# Altium PCB PCB1.PcbDoc
Units mm, origin at the board's own origin, x right, y up, seen from the top; angles counter-clockwise.
Board outline 104.8 x 101.6 mm, 2 copper layers (Top Layer, Bottom Layer); 25 components, 27 nets, 125 pads, 0 vias.
Unrouted connection lines stored in the file: 1.
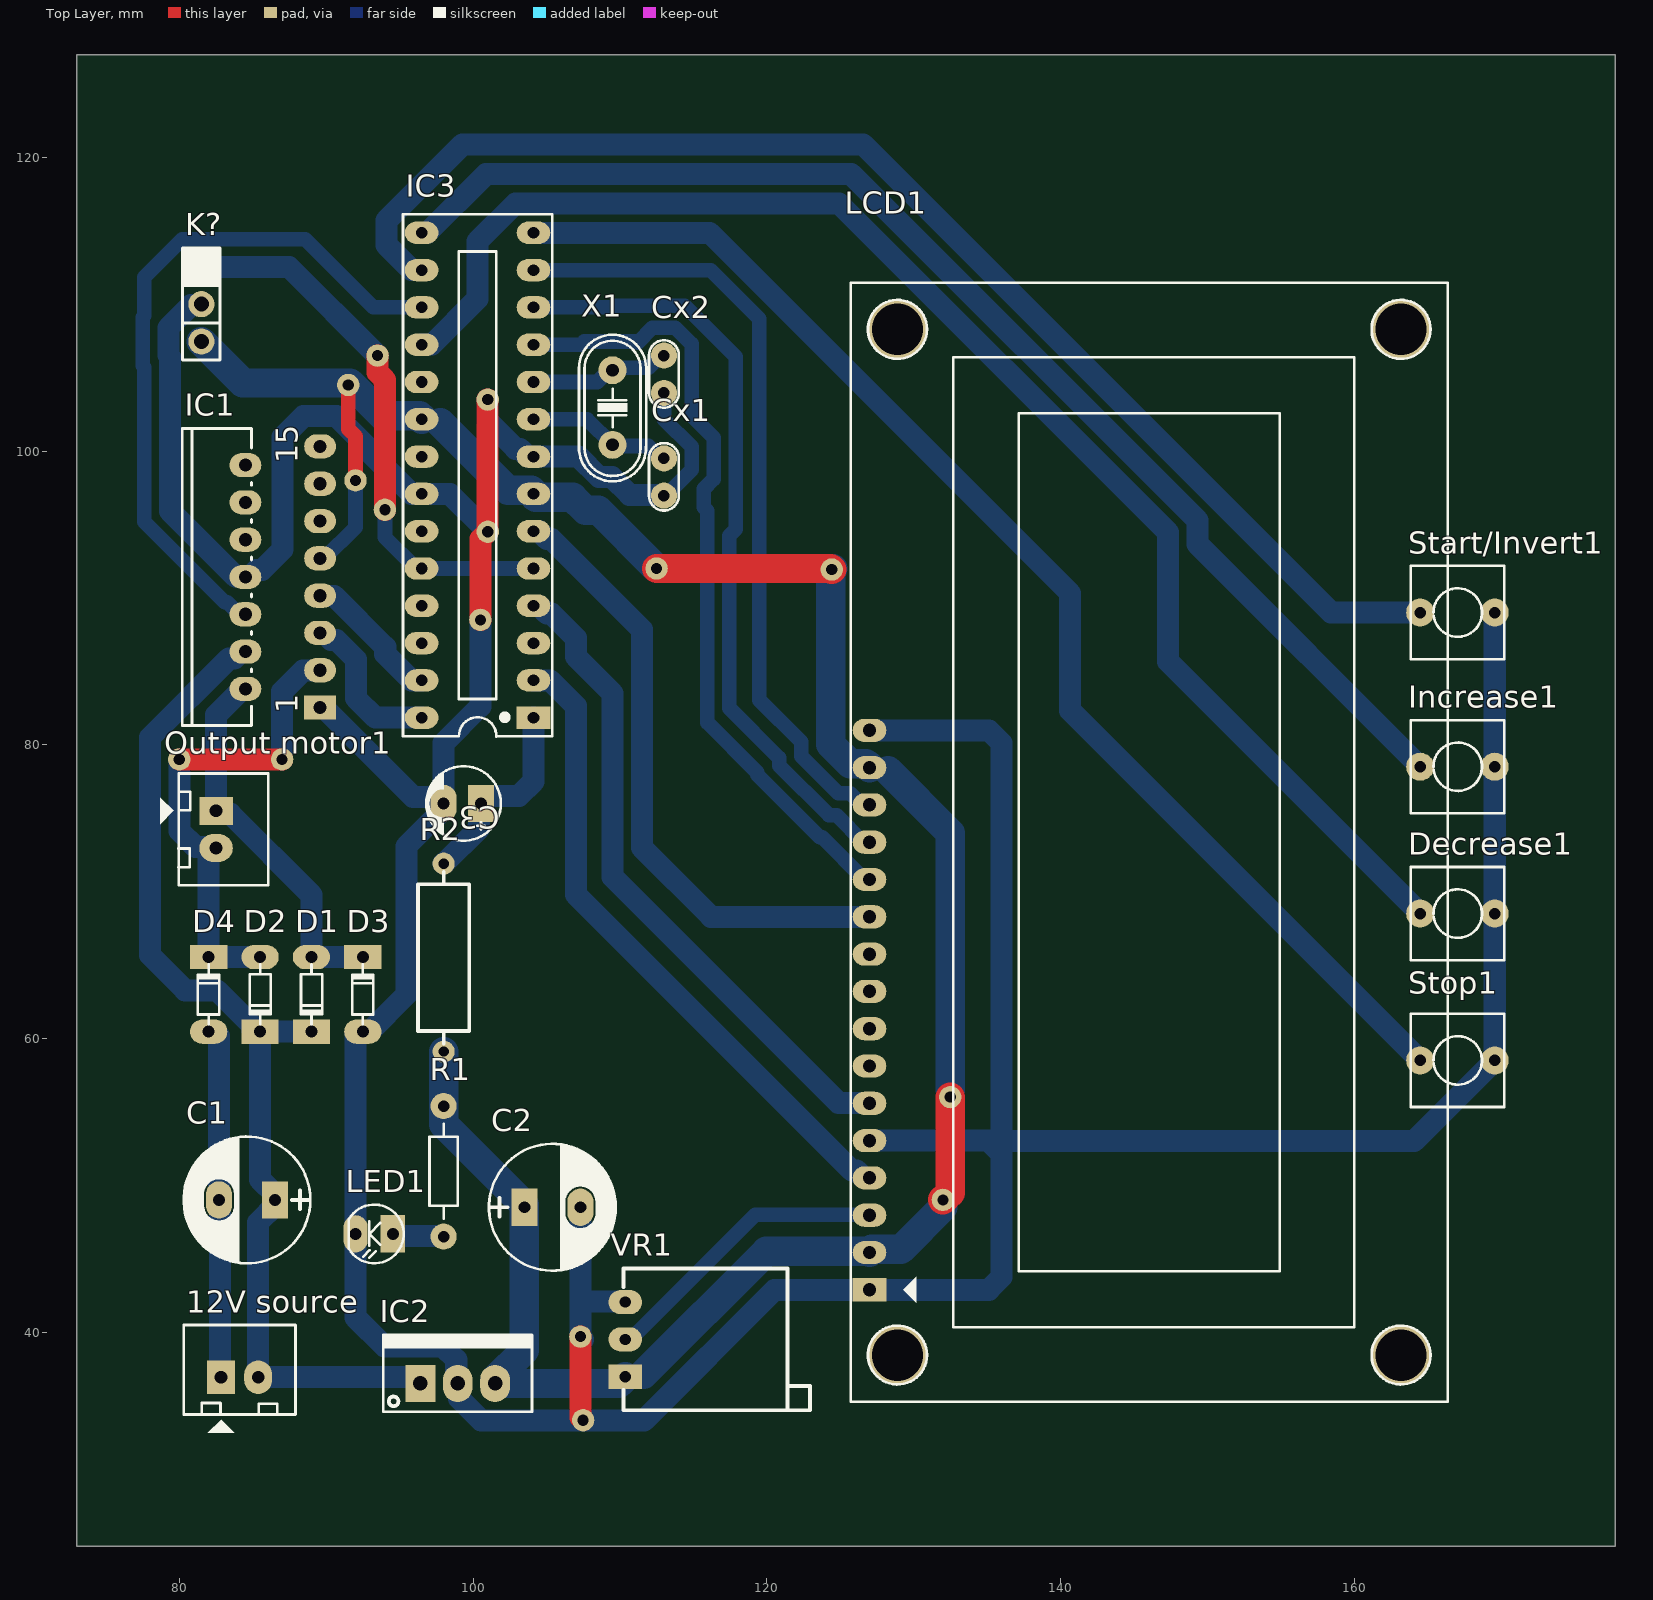
[diagram p0: Top Layer view]
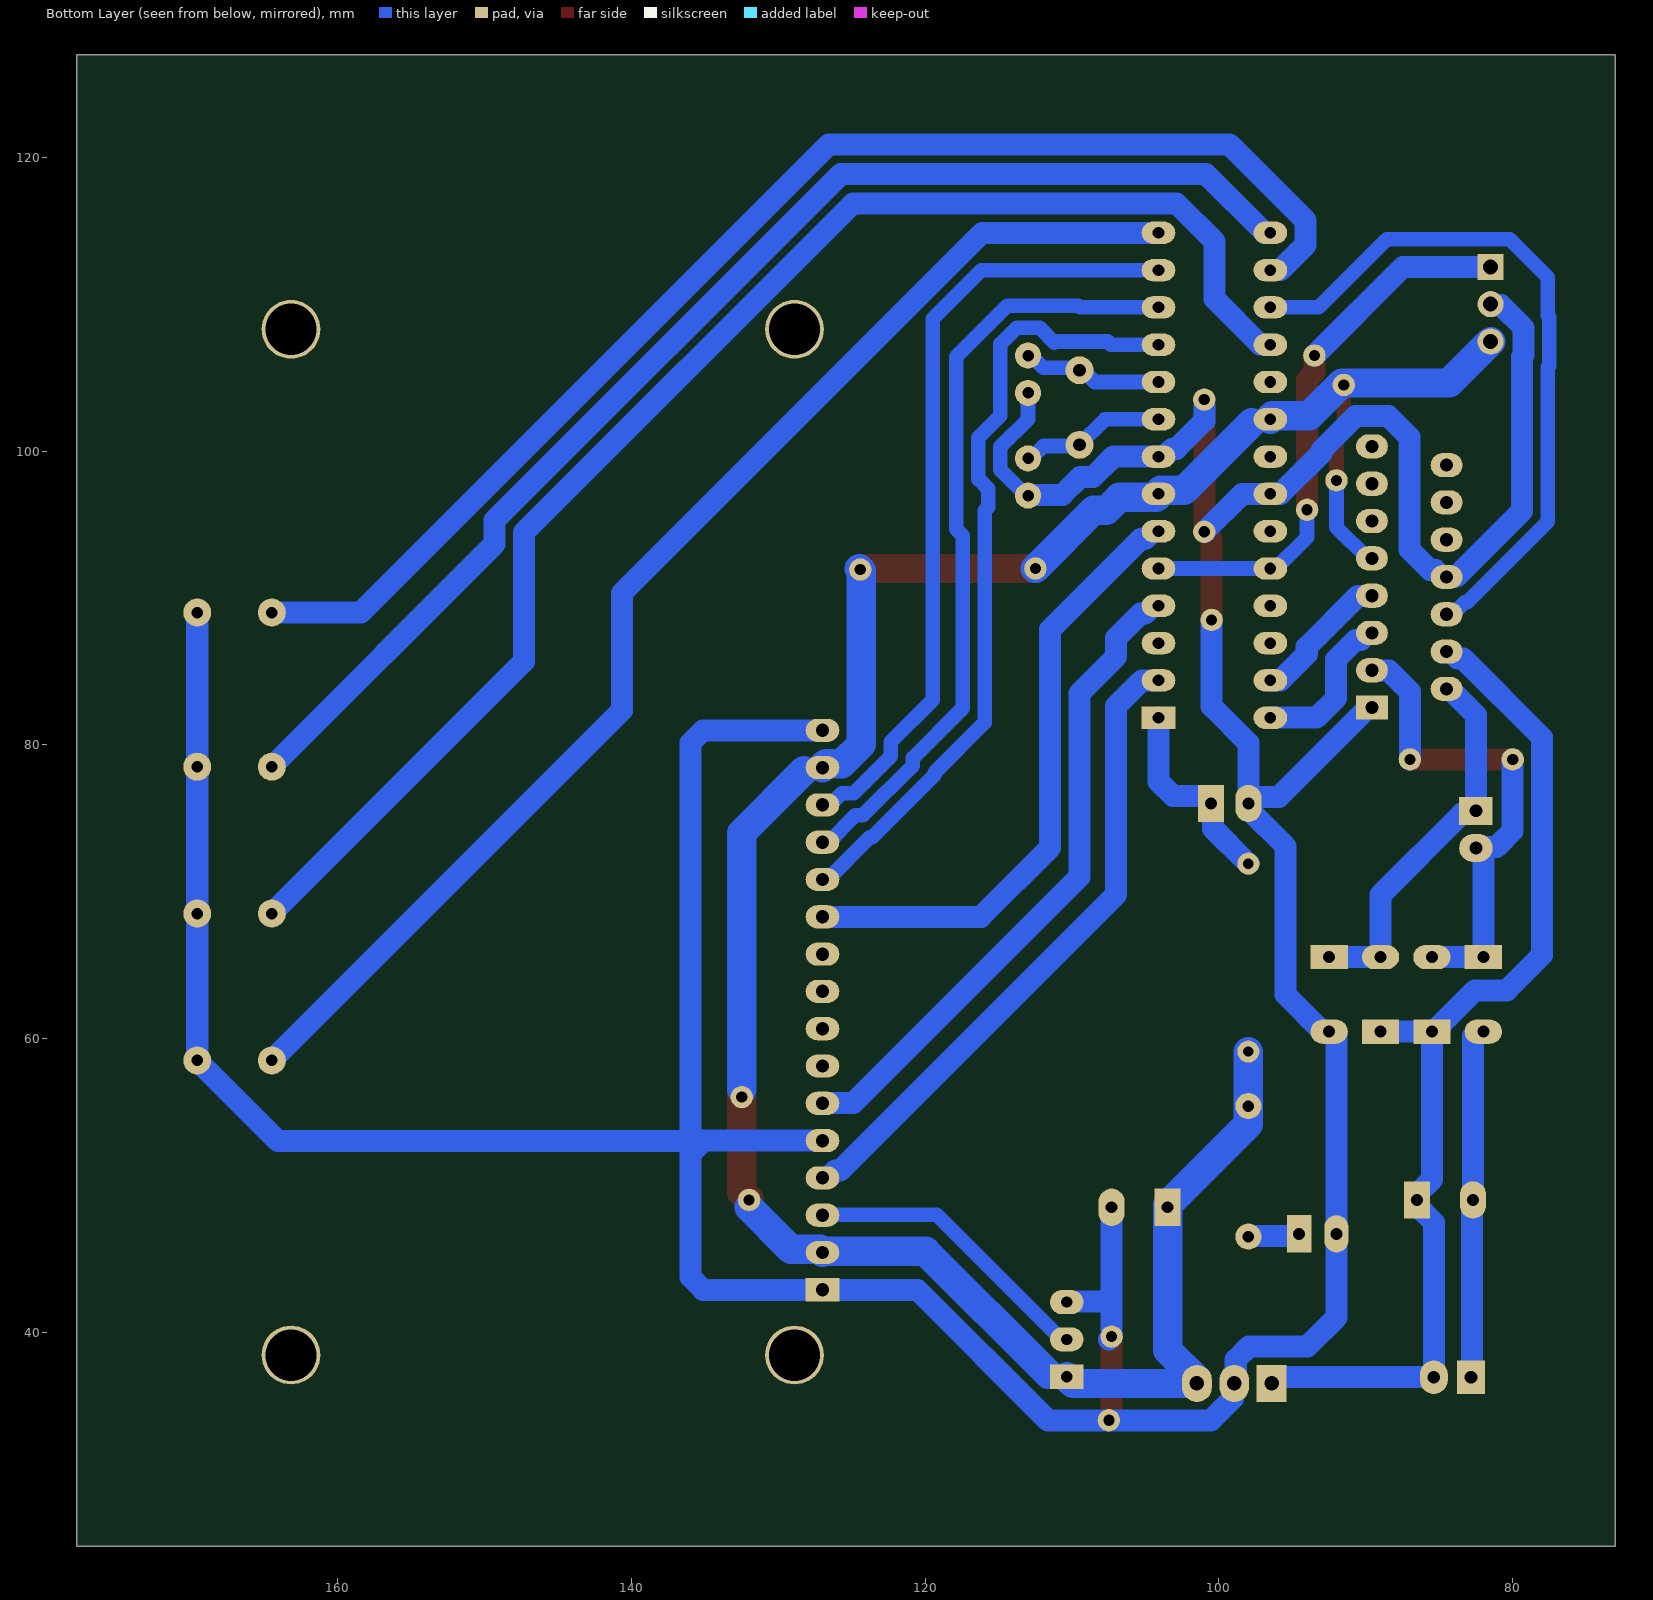
[diagram p1: Bottom Layer view, seen from below]
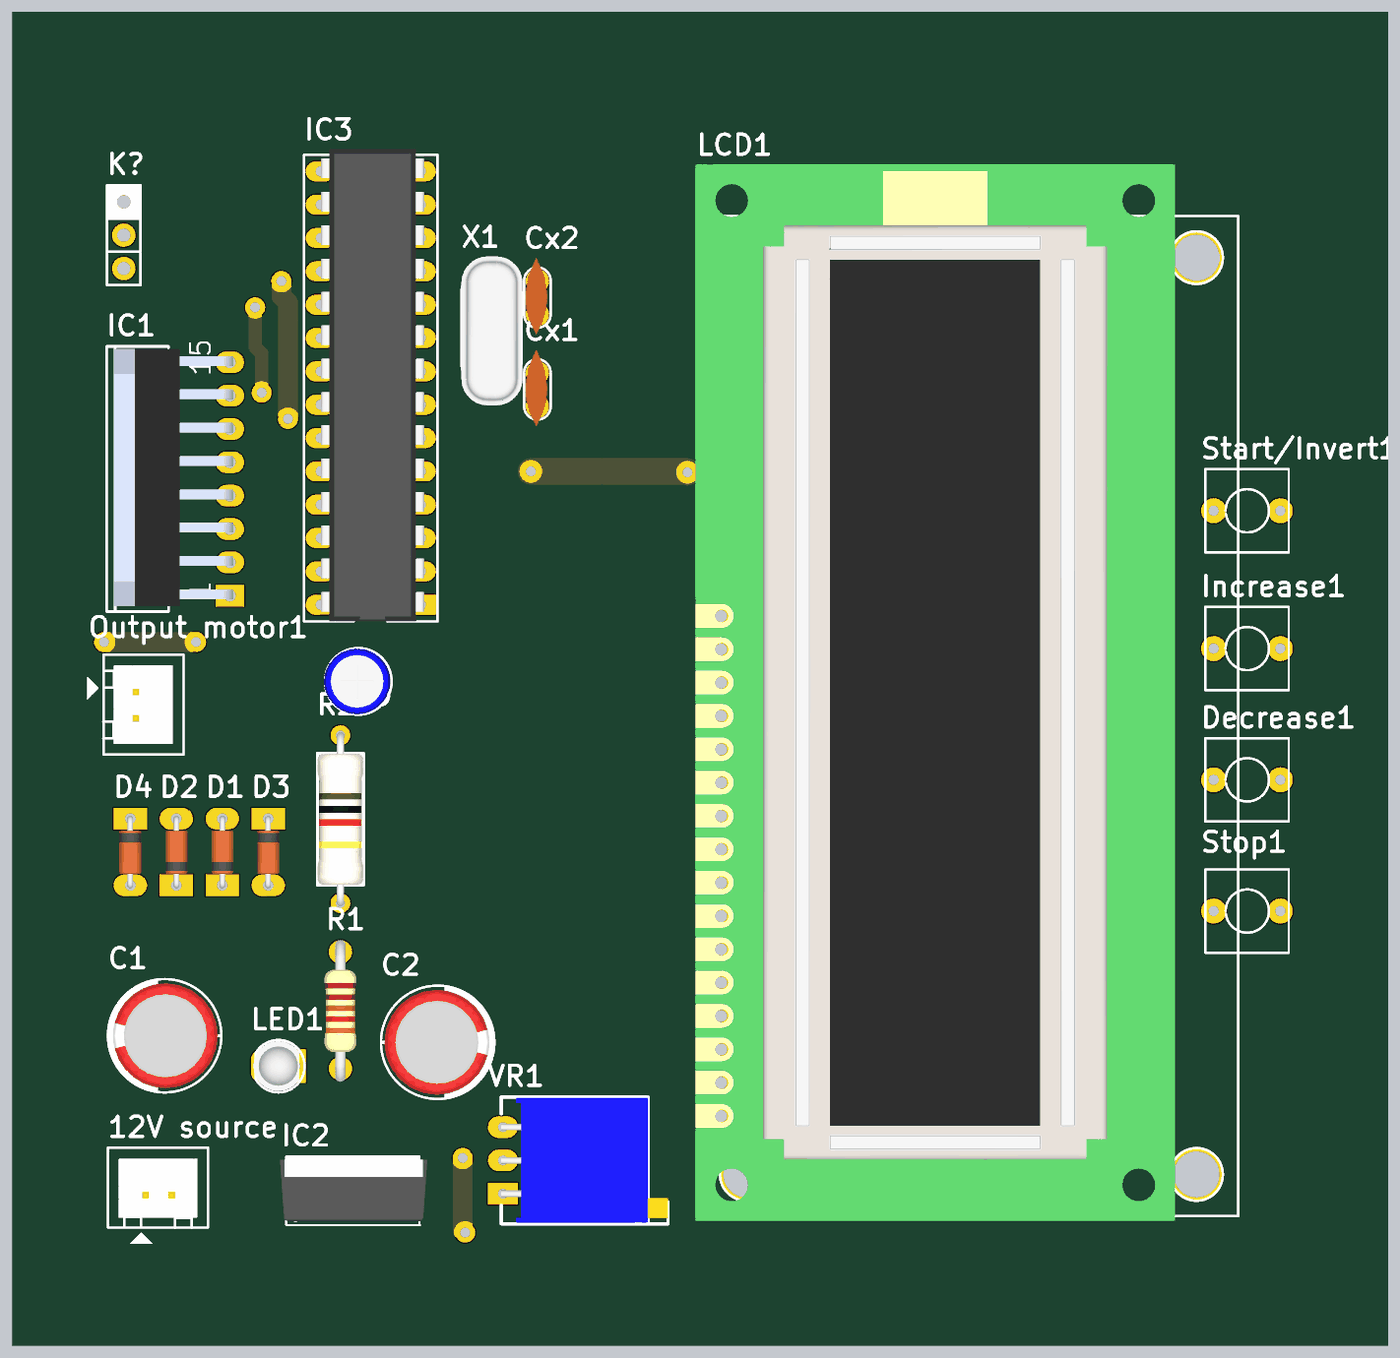
[diagram p2: 3D render of the assembled board from above, using the file's embedded part models]

## Layer stack, top to bottom
Top Solder: solder mask 0.0102, Solder Resist, Dk 3.5
Top Layer: signal copper 0.0356
Dielectric 1: dielectric 0.32, FR-4, Dk 4.8
Bottom Layer: signal copper 0.0356
Bottom Solder: solder mask 0.0102, Solder Resist, Dk 3.5

## Board outline
73,25.4 177.8,25.4 177.8,127 73,127

## Design rules (kind name [scope] priority, off if disabled: settings)
Clearance [All] p1: gap=0.5 ignorepadtopadclearanceinfootprint=FALSE
HoleSize [All] p1: absolutevalues=TRUE maxlimit=2.54 minlimit=1 maxpercent=80.000 minpercent=20.000
PlaneClearance [All] p1: clearance=2
PolygonConnect [All] p1: connectstyle=Direct reliefconductorwidth=0.254 reliefentries=4 polygonreliefangle="90 Angle" airgapwidth=0.254
RoutingVias [All] p1: holewidth=0.711 width=1.27 viastyle="Through Hole" minholewidth=0.711 minwidth=1.27 maxholewidth=0.711 maxwidth=1.27
SolderMaskExpansion [All] p1: expansion=0.102 istentingtop=FALSE
SupplyNets "Schematic Supply Nets" [InNet('GND')] p1: voltage=0.000
SupplyNets "Schematic Supply Nets_2" [InNet('+5')] p2: voltage=0.000
SupplyNets "Schematic Supply Nets_1" [InNet('+12')] p3: voltage=0.000
Width VCC [InNet('+5')] p1: maxlimit=2 minlimit=1 preferedwidth=1
Width [All] p2: maxlimit=1.5 minlimit=1 preferedwidth=1.5
28 further rules are at their usual default settings.

## Components (designator, comment, footprint, x,y, rotation, side; value= is the part's Value field where it differs from the comment)
"12V source" "JP2" CON2 82.832,36.926 r0 top value="Connector 2"
C1 "220uF/35V" CP1.5/3.4 86.515,49 r180 top value=100uF/35V/50V
C2 "220uF/35V" CP1.5/3.4 103.5,48.5 r0 top value=100uF/35V/50V
C3 "10uF" CP1/2 100.54,76 r180 top value=10uF/50V
Cx1 "22pF" CN1 113,96.96 r90 top value=33pF
Cx2 "22pF" CN1 113,103.96 r90 top value=33pF
D1 "100v" "DIODE 0.5A" 89,63 r90 top
D2 "100v" "DIODE 0.5A" 85.5,63 r90 top
D3 "100v" "DIODE 0.5A" 92.5,63 r270 top
D4 "100v" "DIODE 0.5A" 82,63 r270 top
Decrease1 "SW" SW2 169.58,68.5 r180 top value="SW chip 2 pin"
IC1 "L298" DIP15SL2 87.04,91.42 r90 top
IC2 "LM7805" QTO-220 96.42,36.5 r0 top
IC3 "ATmega8-L" DIP28/W0.3 104.12,81.84 r90 top
Increase1 "SW" SW2 169.58,78.5 r180 top value="SW chip 2 pin"
K? "HEADER-1X3" HEADER-1X3 81.5,112.54 r0 top
LCD1 "LCD16x2A" LCD16X2 127,42.88 r90 top
LED1 "LED" LED-3 94.54,46.691 r180 top value="LED 3 ly Single Colour"
"Output motor1" "JP2" CON2 82.5,75.5 r270 top value="Connector 2"
R1 "220R" R1/4W 98,46.5 r90 top value="R1/4W - 1K"
R2 "10k" "tro vach 1/2w" 98,65.5 r270 top
Start/Invert1 "SW" SW2 169.58,89 r180 top value="SW chip 2 pin"
Stop1 "SW" SW2 169.58,58.5 r180 top value="SW chip 2 pin"
VR1 "1" "BIEN TRO VI CHINH NAM" 110.5,39.5 r90 top
X1 "16Mhz" XT2 109.5,102.96 r90 top value=4Mhz

## Footprints (in the part's own frame and the unit in brackets; to place one, negate y for a bottom-side part, rotate by r counter-clockwise, add the part's x,y. Pads: shape width x height; smd on the part's side, far side on the other; paste and mask are expansions set on the pad)
"BIEN TRO VI CHINH NAM" [mil]
  rect 65x90 hole 30: 1(-100,5)
  oval 65x90 hole 30: 2(0,5) 3(100,5)
  silkscreen extent -190,-490 190,10, body extent -187,-490 188,10, height 226
CN1 [mil]
  round 70 hole 31: 1(0,0) 2(100,0)
  silkscreen extent -40,-40 141,40, body extent -60,-30 170,37, height 265
CON2 [mil] "CON2"
  rect 75x90 hole 34: 1(0,0)
  oval 75x90 hole 34: 2(100,0)
  silkscreen extent -100,-150 200,140, body extent -68,-70 168,107, height 236
CP1.5/3.4 [mil] "Tu hoa 220->470uF,16V, 470uF/16V,25V"
  rect 70x100 hole 32: 1(0,0)
  oval 70x100 hole 32: 2(150,0)
  silkscreen extent -95,-170 245,170, body extent -85,-157 230,157, height 446
CP1/2 [mil] "Tu hoa < 22uF/16>50V"
  rect 70x100 hole 32: 1(0,0)
  oval 70x100 hole 32: 2(100,0)
  silkscreen extent -53,-100 147,100, body extent -49,-99 149,99, height 287
"DIODE 0.5A" [mil] "Diode muoi, xung"
  oval 65x100 hole 32: 1(100,0)
  rect 65x100 hole 32: 2(-100,0)
  silkscreen extent -80,-30 80,28, body extent -108,-33 108,32, height 61
DIP15SL2 [mil] "TO, Thru-Hole, Vertical, Heatsink Mounted; 15 Bent Staggered Leads; Pitch 1.27 mm"
  rect 65x85 hole 35.43: 1(-350,-100)
  oval 65x85 hole 35.43: 2(-300,100) 3(-250,-100) 4(-200,100) 5(-150,-100) 6(-100,100) 7(-50,-100) 8(0,100) 9(50,-100) 10(100,100) 11(150,-100) 12(200,100) 13(250,-100) 14(300,100) 15(350,-100)
  silkscreen extent -398,84 398,269, body extent -382,-110 390,247, height 895
DIP28/W0.3 [mil] "28 PIN, W 300mil, Pin to pin 100mil"
  rect 60x90 hole 31: 1(0,0)
  oval 60x90 hole 31: 2(100,0) 3(200,0) 4(300,0) 5(400,0) 6(500,0) 7(600,0) 8(700,0) 9(800,0) 10(900,0) 11(1000,0) 12(1100,0) 13(1200,0) 14(1300,0) 15(1300,300) 16(1200,300) 17(1100,300) 18(1000,300) 19(900,300) 20(800,300) 21(700,300) 22(600,300) 23(500,300) 24(400,300) 25(300,300) 26(200,300) 27(100,300) 28(0,300)
  silkscreen extent -50,-50 1350,350, body extent -50,-10 1367,300, height 200
HEADER-1X3 [mil]
  rect 70x70 hole 40: 1(0,0)
  round 70 hole 40: 2(0,-100) 3(0,-200)
  silkscreen extent -50,-250 50,50, body extent -50,-250 50,50, height 470
LCD16X2 [mil] "LCD dipslay 16x2, 16 pin"
  rect 62x90 hole 36: 1(0,0)
  oval 62x90 hole 36: 2(100,0) 3(200,0) 4(300,0) 5(400,0) 6(500,0) 7(600,0) 8(700,0) 9(800,0) 10(900,0) 11(1000,0) 12(1100,0) 13(1200,0) 14(1300,0) 15(1400,0) 16(1500,0)
  round 157.48 hole 137.8: "Hole 0"(-175,-75) "Hole 0"(-175,-1425) "Hole 0"(2575,-1425) "Hole 0"(2575,-75)
  silkscreen extent -300,-1550 2700,50, body extent -315,-1360 2855,77, height 414
LED-3 [mil] "LED 2 PIN, 3ly Only colour"
  rect 65x100 hole 32: 1(0,0)
  oval 65x100 hole 32: 2(100,0)
  silkscreen extent -29,-78 118,79, body extent -13,-75 125,75, height 217
QTO-220 [mil] "TO-220 - 1-2-3"
  rect 80x100 hole 39: 1(0,0)
  oval 80x100 hole 39: 2(100,0) 3(200,0)
  silkscreen extent -100,-76 300,130, body extent -119,-64 322,121, height 755
R1/4W [mil] "R 1/4W, 2 Pin, 350mil"
  round 70 hole 31: 1(0,0) 2(350,0)
  silkscreen extent 48,-38 302,38, body extent -40,-47 386,47, height 111
SW2 [mil] "SW button 2pin, 250x 250 mil"
  round 75 hole 31: 1(0,0) 2(200,0)
  silkscreen extent -25,-125 225,125
"tro vach 1/2w" [mm]
  round 1.5 hole 0.7: 1(-6.4,0) 2(6.4,0)
  silkscreen extent -5.84,-1.75 5.84,1.75, body extent -6.62,-1.75 6.62,1.75, height 3.5
XT2 [mil] "Footpin for Crystal 2 pin"
  round 75 hole 34: 1(-100,0) 2(100,0)
  silkscreen extent -198,-90 195,90, body extent -233,-93 213,90, height 138

## Part data
"12V source" "Output motor1": library part Con2, "Connector 2"
C1 C2: library part CP3, "Cap 100uF/35V - 470uF/16V", Description 1="1000uF/6,3V - 470uF/16V - 330uF - 25V", Description 2="220uF/35V - 100uF/50V - 63V - 4,7uF/200V", Description 3="22uF => 33uF100V - 3,3uF => 4,7uF/250V", Description 4="2,2uF =>3,3uF/350 - 2,2uF/400V - 1uF/450V"
C3: library part CP1, "Cap P  0,1uF < 22uF , 16 - 50V", Description 1="10 => 220uF/6,3V/10V - 10uF => 100uF/16V", Description 2="0,1uF => 33uF/50V - 10uF => 22uF/63V", Description 3="0,47uF => 10uF/100V"
Cx1 Cx2: library part CN0, "Cremic For Xtal 1pF => 100pF"
D1 D2 D3 D4: library part "Diode 1N4148", "Cắm", Chung_Loai=Cắm, Don_Vi=Con, Ma_Hang=MH001065, Ten_Linh_Kien="Diode 1N4148 DO35 450mA 100V ( 1N4148 DIP)"
Decrease1 Increase1 Start/Invert1 Stop1: library part SW2, "Switch button 2 pin"
IC1: "Dual Full-H Driver", ComponentLink1Description="Manufacturer Link", ComponentLink1URL=http://www.ti.com/, DatasheetVersion=Jun-1990, Note="The tab is elec is connected to GND pin", PackageDescription="TO, Thru-Hole, Vertical, Heatsink Mounted; 15 Bent Staggered Leads; Pitch 1.27 mm", PackageReference=KV015, Published=15-May-2002, Publisher="Altium Limited"
IC2: library part LM78xx, "On ap +, from + 5 to + 24VDC"
IC3: "8-Bit AVR Microcontroller with 8K Bytes of In-System Programmable Flash Memory"
K?: Supplier Part Number 1=S1011E-36-ND, Supplier 1=Digi-Key
LCD1: library part LCD16x2, "LCD dipslay 16 char, 2 line"
LED1: "LED Single colour Green and Red"
R1: library part R, "Resistor 1/4W"
R2: library part "Tro Vach 1/2W 5% 10k", "Cắm", Chung_Loai=Cắm, Don_Vi=Con, Ma_Hang=MH006206, So_Chan=2, Ten_Linh_Kien="Trở 5% 1/2w 10k"
VR1: library part "Bien Tro Tinh Chinh 1K Nam", "Cắm", Chung_Loai=Cắm, Don_Vi=Con, Ma_Hang=MH003234, Ten_Linh_Kien="Biến Trở VR 102-1K 3296W"
X1: library part XT2, "Crystal For all Crystal 2pin."

## Free pads (board coordinates)
  round 1.524 hole 0.762: 21(87,79) 22(80,79) 23(107.31,39.69) 25(107.5,34) 26(132.5,56) 27(132,49) 28(112.5,92) 29(124.429,91.929) 30(93.5,106.5) 31(94,96) 32(92,98) 33(91.5,104.5) 34(101,103.5) 35(101,94.5) 36(100.5,88.5)

## Nets (pads, with @x,y where several pads share a name; then routed paths per layer and width w, separated by ;. In a path a pad name is that pad's centre, name@x,y a point inside that pad or via, vN(x,y) a via of type N, cw(c..) or ccw(c..) an arc to the next point about the centre after c; other vN are vias at no path point)
+5: C2.1 IC1.9 IC2.3 IC3.7 IC3.20 K?.3 LCD1.2 LCD1.15 pad.26 pad.27 pad.28 pad.29 pad.32 pad.33 R1.2 R2.2 VR1.1 | length 167.4
  Top Layer w1: pad.33 91.5,101.5 92,101 pad.32
  Top Layer w2: pad.28 124.357,92 pad.29 ; pad.27 132.5,49.5 pad.26
  Bottom Layer w1: IC1.9 89.876,92.69 92,94.814 pad.32
  Bottom Layer w2: K?.3 84.325,104.636 91.626,104.636 93.863,102.398 96.357,102.398 96.5,102.255 IC3.20 ; 97.778,101.922 102.382,97.318 103.977,97.318 104.12,97.175 IC3.7 104.12,96.985 104.263,96.842 106.781,96.842 107.656,95.967 108.533,95.967 pad.28 ; R2.2 R1.2 98,54.159 103.5,48.659 C2.1 103.5,38.763 101.5,36.763 IC2.3 109.944,36.5 110.373,36.929 VR1.1 ; 111.614,37.135 119.979,45.5 126.92,45.5 LCD1.2 127,45.49 127.143,45.633 129.133,45.633 pad.27@132,48.5 ; pad.29@124.5,92 pad.29 124.357,91.857 124.357,80.033 125.697,78.693 126.747,78.693 126.787,78.653 126.857,78.653 127,78.51 LCD1.15 ; 128.261,78.23 132.5,73.99 pad.26@132.5,56.5
+12: "12V source.2" C1.1 D1.2 D2.2 IC1.4 IC2.1 | length 72.8
  Bottom Layer w1.5: IC1.4 84.205,86.34 83.741,85.876 83.386,85.876 77.988,80.477 77.988,65.689 80.403,63.274 82.565,63.274 84.98,60.86 84.98,60.535 85.055,60.46 D2.2 ; D1.2 D2.2 ; IC2.1 96.42,36.66 96.154,36.926 85.372,36.926 85.372,47.476 86.515,48.619 C1.1 86.515,49.381 85.5,50.396 85.5,51.5 D2.2
B0: IC3.14 Stop1.2 | length 88.4
  Bottom Layer w1.5: IC3.14 116.115,114.86 140.664,90.311 140.664,82.336 Stop1.2
B1: IC3.15 Increase1.2 | length 87.3
  Bottom Layer w1.5: IC3.15 96.881,114.86 100.893,118.872 125.743,118.872 149.337,95.278 149.337,93.663 Increase1.2
B2: IC3.16 Start/Invert1.2 | length 90.5
  Bottom Layer w1.5: IC3.16 96.495,112.325 95.809,112.325 94.107,114.027 94.107,115.693 99.286,120.872 126.571,120.872 158.443,89 Start/Invert1.2
B3: IC1.6 IC3.17 | length 48.1
  Bottom Layer w1: IC1.6 84.07,88.88 83.251,89.699 83.097,89.699 77.611,95.185 77.611,105.692 77.5,105.803 77.5,109.117 77.611,109.228 77.611,111.843 80.197,114.429 88.571,114.429 93.22,109.78 IC3.17
B4: Decrease1.2 IC3.18 | length 99.5
  Bottom Layer w1.5: IC3.18 96.505,107.245 97.191,107.245 100.31,110.364 100.31,114.276 102.906,116.872 124.914,116.872 147.337,94.449 147.337,85.663 Decrease1.2
B5: IC3.19
C0: IC3.23
C3: IC3.26
C4: IC1.7 IC3.27 | length 9.6
  Bottom Layer w1.5: IC1.7 89.609,90.121 90.547,90.121 94.023,86.645 94.023,86.171 95.809,84.385 96.495,84.385 IC3.27
C5: IC1.5 IC3.28 | length 10.9
  Bottom Layer w1.5: IC1.5 89.875,87.61 90.339,87.146 90.694,87.146 92.023,85.816 92.023,83.169 93.352,81.84 IC3.28
D0: IC3.2 LCD1.4 | length 44.4
  Bottom Layer w1.5: IC3.2 104.125,84.375 105.257,84.375 107,82.633 107,69.803 125.8,51.003 126.122,51.003 126.624,50.5 LCD1.4
D2: IC3.4 LCD1.6 | length 45
  Bottom Layer w1.5: IC3.4 104.507,89.46 105.035,88.932 105.334,88.932 107,87.266 107,86 109.5,83.5 109.5,71 124.906,55.594 126.986,55.594 LCD1.6
D4: IC3.6 LCD1.11 | length 42.5
  Bottom Layer w1.5: IC3.6 104.507,94.54 105.035,94.012 105.334,94.012 111.5,87.846 111.5,73 116.22,68.28 LCD1.11
D5: IC3.11 LCD1.12 | length 54.1
  Bottom Layer w1: IC3.11 107.37,107.24 107.582,107.452 111.137,107.452 111.209,107.381 112.218,108.389 113.782,108.389 114.889,107.282 114.889,102.404 116.389,100.904 116.389,98.096 115.707,97.414 115.707,96.172 115.95,95.929 115.95,81.515 119.357,78.107 119.357,77.961 123.626,73.693 123.772,73.693 126.644,70.82 LCD1.12
D6: IC3.12 LCD1.13 | length 53
  Bottom Layer w1: IC3.12 109.469,109.78 109.578,109.889 114.404,109.889 117.889,106.404 117.889,94.672 117.45,94.232 117.45,82.5 120.857,79.093 120.857,78.583 124.247,75.193 124.757,75.193 126.59,73.36 LCD1.13
D7: IC3.13 LCD1.14 | length 53.7
  Bottom Layer w1: IC3.13 116.18,112.32 119.5,109 119.5,83.044 122.357,80.187 122.357,79.204 124.869,76.693 125.696,76.693 126.489,75.9 LCD1.14
encoder: IC3.5 IC3.24 K?.1 pad.30 pad.31 | length 38.1
  Top Layer w1.5: pad.30 93.505,106.495 93.505,105.341 94.012,104.833 94.012,96.018 94,96.006 pad.31
  Bottom Layer w1: pad.31 94,94.119 96.119,92 IC3.24 IC3.5
  Bottom Layer w1.5: K?.1 87.46,112.54 pad.30
GND: "12V source.1" C1.2 C2.2 C3.2 Cx1.1 Cx2.1 D3.1 D4.1 Decrease1.1 IC1.1 IC1.8 IC2.2 IC3.8 IC3.22 Increase1.1 K?.2 LCD1.1 LCD1.5 LCD1.16 LED1.2 pad.23 pad.25 pad.34 pad.35 pad.36 Start/Invert1.1 Stop1.1 VR1.3 | length 367.9
  Top Layer w1.5: pad.36 100.5,93.994 101,94.494 pad.35 pad.34 ; pad.23 107.31,34.197 107.5,34.006 pad.25
  Bottom Layer w1: Cx1.1 113.131,96.96 114.889,98.718 114.889,100.282 113,102.171 Cx2.1@113,103.885
  Bottom Layer w1.5: K?.2 81.447,109.947 80.805,109.947 79.25,108.392 79.25,106.528 79.361,106.417 79.361,95.91 83.822,91.449 84.471,91.449 IC1.8 84.795,91.42 85.259,91.885 85.614,91.885 87.04,93.311 87.04,100.959 88.466,102.386 90.694,102.386 92.99,100.09 92.99,99.904 95.809,97.085 96.495,97.085 IC3.22 96.505,97.075 98.425,97.075 pad.35 ; D4.1 82.404,60.46 82.705,60.159 C1.2 82.758,48.947 82.758,36.999 82.832,36.926 ; IC1.1 89.834,82.53 95.93,76.434 97.872,76.434 C3.2@98,76.306 ; pad.36 100.5,82.614 98,80.114 C3.2@98,76.306 ; pad.34@101,103 101,102.054 102.906,100.148 103.205,100.148 103.733,99.62 IC3.8 107.185,99.62 108.588,98.217 109.464,98.217 110.669,97.013 112.947,97.013 Cx1.1 ; C2.2 107.31,42.454 ; pad.23@107.5,39.5 pad.23 107.31,42.454 ; VR1.3 110.344,42.069 107.695,42.069 107.31,42.454 ; Cx2.1@113,103.885 Cx2.1 ; LCD1.5 135.081,53.04 136,52.121 136,43.759 135.121,42.88 LCD1.1 120.541,42.88 111.641,33.98 100.561,33.98 99.062,35.48 99.062,36.398 IC2.2 98.858,36.602 98.858,38.116 97.954,39.02 93.98,39.02 92,41 LED1.2 92,60.364 92.096,60.46 D3.1 92.944,60.46 95.46,62.976 95.46,73.079 98,75.619 C3.2 C3.2@98,76.306 ; LCD1.16 135.121,80.98 136,80.101 136,53 164.08,53 Stop1.1 Decrease1.1 Increase1.1 Start/Invert1.1
NetC3_1: C3.1 IC3.1 R2.1 | length 13.9
  Bottom Layer w1.5: R2.1 100.401,74.301 100.401,75.861 C3.1 100.54,76.361 100.679,76.5 103.121,76.5 104.12,77.499 IC3.1
NetCx1_2: Cx1.2 IC3.9 X1.1 | length 10
  Bottom Layer w1: IC3.9 107.76,102.16 X1.1 109.583,100.337 111.952,100.337 112.789,99.5 Cx1.2
NetCx2_2: Cx2.2 IC3.10 X1.2 | length 9.6
  Bottom Layer w1: IC3.10 108.455,104.7 109.255,105.5 X1.2 109.663,105.663 111.952,105.663 112.789,106.5 Cx2.2
NetLED1_1: LED1.1 R1.1 | length 3.6
  Bottom Layer w1.5: LED1.1 94.54,46.629 94.615,46.553 97.947,46.553 R1.1
OUT1: "Output motor1.1" D1.1 D3.2 IC1.2 | length 24.8
  Bottom Layer w1.5: 82.5,75.5 82.5,82.013 84.287,83.8 IC1.2 ; 83.468,75.297 89,69.765 D1.1 D3.2
OUT2: "Output motor1.2" D2.1 D4.2 IC1.3 pad.21 pad.22 | length 33.2
  Top Layer w1.5: pad.22 pad.21
  Bottom Layer w1.5: pad.22 80,74.137 81.099,73.037 82.423,73.037 82.5,72.96 ; 82,72.541 D4.2 D2.1 ; pad.21 87,83.623 88.418,85.041 89.551,85.041 IC1.3
VR: LCD1.3 VR1.2 | length 20.2
  Bottom Layer w1: VR1.2 110.732,39.5 119.232,48 126.96,48 LCD1.3
pads on no net: "LCD1.Hole 0" IC1.10 IC1.11 IC1.12 IC1.13 IC1.14 IC1.15 IC3.3 IC3.21 IC3.25 LCD1.7 LCD1.8 LCD1.9 LCD1.10

## Other copper
Multi-Layer:
  region: 253.038,218.244 268.446,218.244 268.446,210.559 253.038,210.559
  region: 253.038,218.244 268.446,218.244 268.446,210.559 253.038,210.559
  region: 253.038,218.244 268.446,218.244 268.446,210.559 253.038,210.559
  region: 232.613,216.993 237.808,216.993 237.808,211.81 232.613,211.81
  region: 232.613,216.993 237.808,216.993 237.808,211.81 232.613,211.81
  region: 232.613,216.993 237.808,216.993 237.808,211.81 232.613,211.81
  region: 232.613,216.993 237.808,216.993 237.808,211.81 232.613,211.81
  region: 232.613,216.993 237.808,216.993 237.808,211.81 232.613,211.81
  region: 232.613,216.993 237.808,216.993 237.808,211.81 232.613,211.81
  region: 232.613,216.993 237.808,216.993 237.808,211.81 232.613,211.81
  region: 232.613,216.993 237.808,216.993 237.808,211.81 232.613,211.81
  region: 232.613,216.993 237.808,216.993 237.808,211.81 232.613,211.81
  region: 232.613,216.993 237.808,216.993 237.808,211.81 232.613,211.81
  region: 232.613,216.993 237.808,216.993 237.808,211.81 232.613,211.81
  region: 232.613,216.993 237.808,216.993 237.808,211.81 232.613,211.81
  region: 232.613,216.993 237.808,216.993 237.808,211.81 232.613,211.81
  region: 232.613,216.993 237.808,216.993 237.808,211.81 232.613,211.81
  region: 232.613,216.993 237.808,216.993 237.808,211.81 232.613,211.81
  region: 232.613,216.993 237.808,216.993 237.808,211.81 232.613,211.81
  region: 232.613,216.993 237.808,216.993 237.808,211.81 232.613,211.81
  region: 232.613,216.993 237.808,216.993 237.808,211.81 232.613,211.81
  region: 232.613,216.993 237.808,216.993 237.808,211.81 232.613,211.81
  region: 232.613,216.993 237.808,216.993 237.808,211.81 232.613,211.81
  region: 232.613,216.993 237.808,216.993 237.808,211.81 232.613,211.81
  region: 232.613,216.993 237.808,216.993 237.808,211.81 232.613,211.81
  region: 232.613,216.993 237.808,216.993 237.808,211.81 232.613,211.81
  region: 232.613,216.993 237.808,216.993 237.808,211.81 232.613,211.81
  region: 232.613,216.993 237.808,216.993 237.808,211.81 232.613,211.81
  region: 232.613,216.993 237.808,216.993 237.808,211.81 232.613,211.81
  region: 232.613,216.993 237.808,216.993 237.808,211.81 232.613,211.81
  region: 232.613,216.993 237.808,216.993 237.808,211.81 232.613,211.81
  region: 232.613,216.993 237.808,216.993 237.808,211.81 232.613,211.81
  text "+" at 243.721,223.605 h2.6
  text "1" at 244.972,223.605 h2.6
  text "2" at 246.044,223.605 h2.6
  text "+" at 274.717,221.103 h2.6
  text "5" at 275.968,221.103 h2.6
  text "I" at 253.038,218.601 h2.6
  text "C" at 253.752,218.601 h2.6
  text "2" at 255.182,218.601 h2.6
  text "L" at 258.054,218.601 h2.6
  text "M" at 259.484,218.601 h2.6
  text "7" at 261.628,218.601 h2.6
  text "8" at 262.7,218.601 h2.6
  text "0" at 263.773,218.601 h2.6
  text "5" at 264.845,218.601 h2.6
  text "1" at 232.792,217.35 h2.6
  text "2" at 234.043,217.35 h2.6
  text "V" at 235.294,217.35 h2.6
  text "s" at 237.259,217.35 h2.6
  text "o" at 238.153,217.35 h2.6
  text "u" at 239.404,217.35 h2.6
  text "r" at 240.655,217.35 h2.6
  text "c" at 241.191,217.35 h2.6
  text "e" at 242.084,217.35 h2.6
  text "1" at 250.171,216.099 h2.6
  text "3" at 270.238,216.099 h2.6
  text "D" at 264.146,215.563 h2.6
  text "2" at 234.942,214.848 h2.6
  text "I" at 254.829,214.848 h2.6
  text "N" at 255.723,214.848 h2.6
  text "O" at 261.817,214.848 h2.6
  text "U" at 263.425,214.848 h2.6
  text "T" at 265.033,214.848 h2.6
  text "N" at 264.146,213.955 h2.6
  text "G" at 264.146,212.346 h2.6
  text "1" at 235.121,212.168 h2.6
  text "J" at 232.792,209.666 h2.6
  text "P" at 233.685,209.666 h2.6
  text "2" at 234.757,209.666 h2.6
  text "2" at 262.892,207.521 h2.6
  text "R" at 292.454,206.092 h2.6
  text "1" at 293.884,206.092 h2.6
  text "C" at 247.483,205.377 h2.6
  text "1" at 248.913,205.377 h2.6
  text "C" at 277.942,205.377 h2.6
  text "2" at 279.371,205.377 h2.6
  text "2" at 292.454,203.59 h2.6
  text "2" at 293.705,203.59 h2.6
  text "0" at 294.777,203.59 h2.6
  text "R" at 295.85,203.59 h2.6
  text "2" at 247.483,202.875 h2.6
  text "2" at 248.734,202.875 h2.6
  text "0" at 249.985,202.875 h2.6
  text "u" at 251.236,202.875 h2.6
  text "F" at 252.487,202.875 h2.6
  text "/" at 253.559,202.875 h2.6
  text "3" at 254.095,202.875 h2.6
  text "5" at 255.168,202.875 h2.6
  text "V" at 256.24,202.875 h2.6
  text "2" at 277.942,202.875 h2.6
  text "2" at 279.193,202.875 h2.6
  text "0" at 280.444,202.875 h2.6
  text "u" at 281.694,202.875 h2.6
  text "F" at 282.945,202.875 h2.6
  text "/" at 284.018,202.875 h2.6
  text "3" at 284.554,202.875 h2.6
  text "5" at 285.626,202.875 h2.6
  text "V" at 286.698,202.875 h2.6
  text "L" at 294.246,196.263 h2.6
  text "E" at 295.675,196.263 h2.6
  text "D" at 297.105,196.263 h2.6
  text "1" at 298.535,196.263 h2.6
  text "L" at 294.246,193.761 h2.6
  text "E" at 295.675,193.761 h2.6
  text "D" at 297.105,193.761 h2.6
  text "G" at 258.233,183.039 h2.6
  text "N" at 259.842,183.039 h2.6
  text "D" at 261.45,183.039 h2.6

## Text inside footprints (layer, text, board x,y; h text height)
IC1: Top Overlay "1" at 88.056,82.149 h1.5 r90; Top Overlay "15" at 88.056,99.167 h1.5 r90